# Altium PCB usb_pd_source.PcbDoc
Units mil, origin at the board's own origin, x right, y up, seen from the top; angles counter-clockwise.
Board outline 3045 x 790 mil, 2 copper layers (Top Layer, Bottom Layer); 22 components, 16 nets, 97 pads, 11 vias.
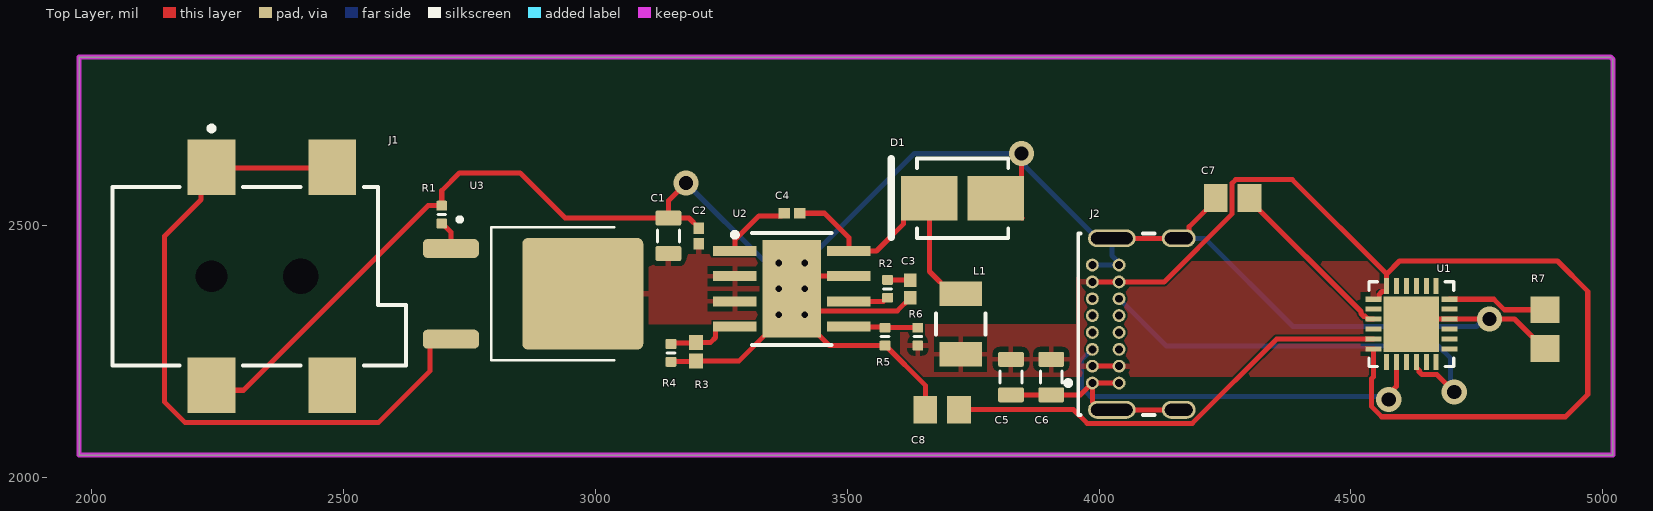
[diagram p0: Top Layer view]
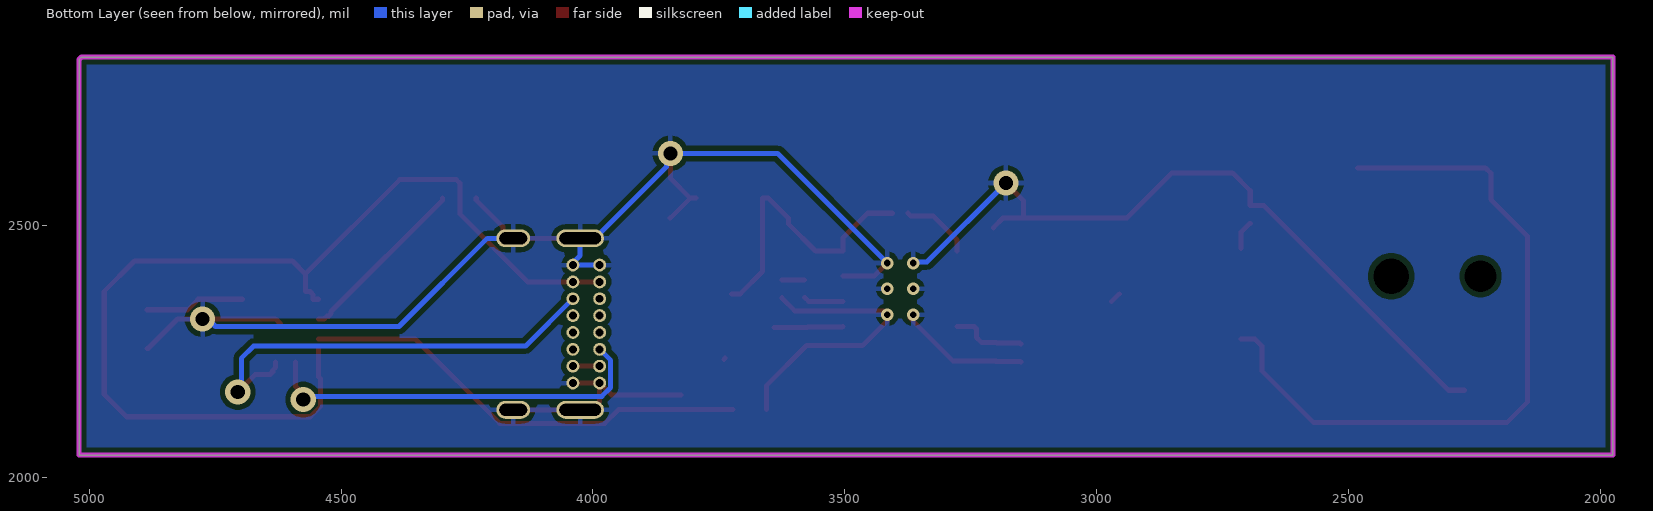
[diagram p1: Bottom Layer view, seen from below]
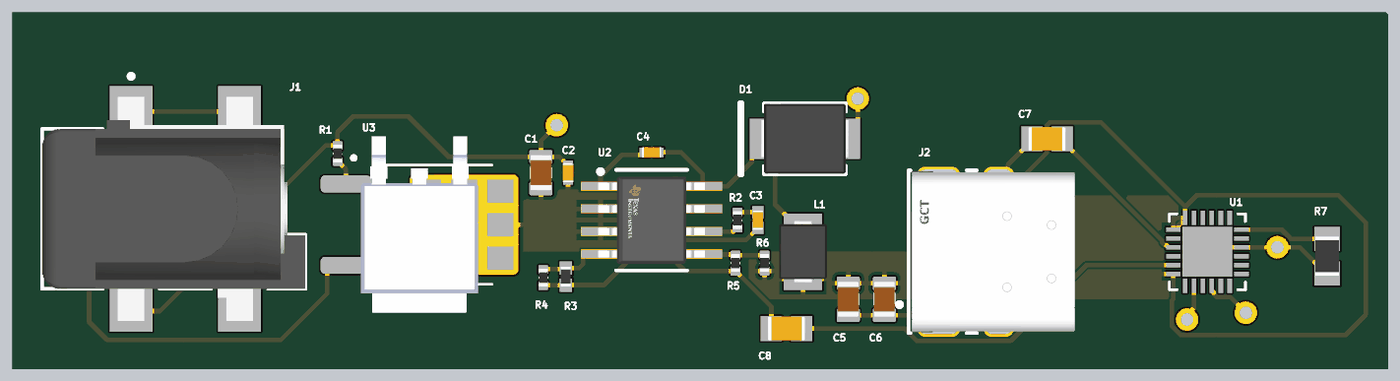
[diagram p2: 3D render of the assembled board from above, using the file's embedded part models]

## Layer stack, top to bottom
Top Solder: solder mask 0.4, Solder Resist, Dk 3.5
Top Layer: signal copper 1.4
Dielectric 1: dielectric 12.6, FR-4, Dk 4.8
Bottom Layer: signal copper 1.4
Bottom Solder: solder mask 0.4, Solder Resist, Dk 3.5

## Board outline
1975,2045 5020,2045 5020,2830 5015,2835 1975,2835

## Design rules (kind name [scope] priority, off if disabled: settings)
Clearance [All] p1: gap=4 ignorepadtopadclearanceinfootprint=FALSE
HoleSize [All] p1: absolutevalues=TRUE maxlimit=150 minlimit=10 maxpercent=80.000 minpercent=20.000
MinimumAnnularRing [All] p1: minimumring=4
MinimumSolderMaskSliver [All] p1: minsoldermaskwidth=1
PolygonConnect [All] p1: connectstyle=Relief reliefconductorwidth=10 reliefentries=4 polygonreliefangle="90 Angle" airgapwidth=10
RoutingVias [All] p1: holewidth=10 width=22 viastyle="Through Hole" minholewidth=10 minwidth=22 maxholewidth=100 maxwidth=150
SilkToSolderMaskClearance [IsPad] p1: minsilkscreentomaskgap=3 clearancetoexposedcopper=TRUE
SolderMaskExpansion [All] p1: expansion=4 istentingtop=FALSE
Width [All] p1: maxlimit=150 minlimit=8 preferedwidth=10
27 further rules are at their usual default settings.

## Classes and differential pairs
component class sheet3_pd_controller: C7 C8 R7 U1
component class sheet2_buck_converter: C3 C4 C5 C6 D1 L1 R2 R3 R4 R5 R6 U2
component class sheet1_input_and_protection: C1 C2 J1 R1

## Components (designator, comment, footprint, x,y, rotation, side; value= is the part's Value field where it differs from the comment)
C1 "Capacitor 22µF +/-40% 16V 0805" CAPC0805(2012)145_L 3145,2480 r270 top value=22µF
C2 "Capacitor 0.1 uF +/- 5% 16 V 0402" CAPC1005X56X25LL10T15 3205,2480 r270 top value=100nF
C3 "Capacitor 6.8 nF +/- 10% 16 V 0402" CAPC1005X56X25NL10T15 3625,2375 r270 top value=6.8nF
C4 "Capacitor 0.1 uF +/- 5% 16 V 0402" CAPC1005X56X25LL10T15 3390,2525 r180 top value=100nF
C5 "Capacitor 22µF +/-40% 16V 0805" CAPC0805(2012)145_L 3825,2200 r90 top value=22µF
C6 "Capacitor 22µF +/-40% 16V 0805" CAPC0805(2012)145_L 3905,2200 r90 top value=22µF
C7 "Capacitor 1 uF +/- 10% 50 V 0805" CAPC2013X135X45NL10T25 4265,2555 r180 top value=1µF
C8 "Capacitor 1 uF +/- 10% 50 V 0805" CAPC2013X135X45NL10T25 3688.46,2135 r180 top value=1µF
D1 "SS54B" JCET-SMB-2_M 3729.06,2555 r180 top
J1 "PJ-002AH-SMT-TR" CUI-PJ-002AH-4_V 2332.32,2400 r0 top
J2 "USB4085-GF-A" FP-USB4085-GF-A-MFG 4145,2305 r90 top
L1 "CM322522-100KL" BOUR-CM322522_V 3725,2305 r270 top
R1 "100KR2F" RESC0402(1005)_L 2695,2522.28 r270 top value=100k
R2 "12KR2F" RESC0402(1005)_L 3580,2375 r270 top value=12k
R3 "Resistor 33k +/-5% 0402 63 mW" RESC1005X40X25ML10T10 3200,2250 r90 top value=33k
R4 "324KR2F" RESC0402(1005)_L 3150,2247.72 r90 top value=324k
R5 "Resistor 5K6  +/-5 % 0402 63 mW" RESC0402(1005)_L 3575,2280 r270 top value=8k
R6 "Resistor 43K2 +/-1 % 0402 63 mW" RESC0402(1005)_L 3640,2280 r270 top value=43.2k
R7 "Resistor 4k7 +/-1% 0805 125 mW" RESC2013X70X40ML20T20 4885,2295 r270 top value=4.7k
U1 "STUSB4710AQTR" *QFN24EP_4X4_STM 4620,2305 r90 top
U2 "TPS54560DDA" FP-DDA0008E-MFG 3390,2375 r0 top
U3 "Component_1" DPAK228P990X239-4N 2876.18,2365 r270 top

## Footprints (in the part's own frame and the unit in brackets; to place one, negate y for a bottom-side part, rotate by r counter-clockwise, add the part's x,y. Pads: shape width x height; smd on the part's side, far side on the other; paste and mask are expansions set on the pad)
*QFN24EP_4X4_STM [mm]
  rect 0.808x0.255 smd: 1(-1.915,1.25) 2(-1.915,0.75) 3(-1.915,0.25) 4(-1.915,-0.25) 5(-1.915,-0.75) 6(-1.915,-1.25) 13(1.915,-1.25) 14(1.915,-0.75) 15(1.915,-0.25) 16(1.915,0.25) 17(1.915,0.75) 18(1.915,1.25)
  rect 0.255x0.808 smd: 7(-1.25,-1.915) 8(-0.75,-1.915) 9(-0.25,-1.915) 10(0.25,-1.915) 11(0.75,-1.915) 12(1.25,-1.915) 19(1.25,1.915) 20(0.75,1.915) 21(0.25,1.915) 22(-0.25,1.915) 23(-0.75,1.915) 24(-1.25,1.915)
  rect 2.794x2.794 smd: 25(0,0)
  silkscreen extent -2.13,-2.13 2.13,2.13
BOUR-CM322522_V [mm] "Inductor, 2-Leads, Body 3.2x2.5mm, Pitch 3.05mm"
  rect 1.25x2.15 smd: 1(-1.525,0) 2(1.525,0)
  silkscreen extent -0.54,-1.25 0.54,1.25, body extent -1.77,-1.35 1.77,1.35, height 2.4
CAPC0805(2012)145_L [mm] "Chip Capacitor, Body 2.0x1.2mm, Height 1.45mm, IPC High Density"
  rrect25% 0.76x1.3 smd: 1(-0.9,0) 2(0.89,0)
  silkscreen extent -0.3,-0.55 0.3,0.55, body extent -1,-0.6 1,0.6, height 1.45
CAPC1005X56X25LL10T15 [mm] "Chip Capacitor, 2-Leads, Body 1.10x0.60mm, IPC High Density"
  rect 0.58x0.54 smd: 1(-0.39,0) 2(0.39,0)
  body extent -0.55,-0.3 0.55,0.3, height 0.56
CAPC1005X56X25NL10T15 [mm] "Chip Capacitor, 2-Leads, Body 1.10x0.60mm, IPC Medium Density"
  rect 0.68x0.64 smd: 1(-0.44,0) 2(0.44,0)
  body extent -0.55,-0.3 0.55,0.3, height 0.56
CAPC2013X135X45NL10T25 [mm] "Chip Capacitor, 2-Leads, Body 2.10x1.35mm, IPC Medium Density"
  rect 1.2x1.4 smd: 1(-0.85,0) 2(0.85,0)
  body extent -1.05,-0.67 1.05,0.67, height 1.35
CUI-PJ-002AH-4_V [mm] "SMD, 4-Leads, Body 14.8x9 mm, Pitch 6.1mm"
  rect 2.4x2.8 smd: 1(-2.4,5.5) 1(3.7,5.5) 2(-2.4,-5.5) 3(3.7,-5.5)
  round 0 hole 1.6: MH1(-2.4,0)
  round 0 hole 1.8: MH2(2.1,0)
  silkscreen extent -7.4,-4.5 7.4,7.57, body extent -7.4,-6.3 7.4,6.3, height 11.2
DPAK228P990X239-4N [mm]
  rrect50% 0.96x2.83 smd: 1(-2.286,-4.14) 3(2.286,-4.14)
  rrect10% 5.63x6.1 smd paste-4: 2(0,2.51)
  silkscreen extent -3.86,-3.81 3.35,4.09, body extent -4.95,-3.29 4.95,3.29, height 2.39
FP-DDA0008E-MFG [mm]
  rect 2.2x0.5 smd paste-1000 mask+0: 1(-2.875,1.905) 2(-2.875,0.635) 3(-2.875,-0.635) 4(-2.875,-1.905) 5(2.875,-1.905) 6(2.875,-0.635) 7(2.875,0.635) 8(2.875,1.905)
  rect 2.95x4.9 smd paste-1000 mask-1000: 9(0,0)
  silkscreen extent -3,-2.83 2,2.85, body extent -4.08,-2.68 4.08,2.68, height 0.25
FP-USB4085-GF-A-MFG [mm]
  rrect100% 0.9x2.4 hole 2.1 slot 0.6 at 0 deg paste-2539.97 mask+0: 1(-4.325,3.045) 2(4.325,3.045)
  rrect100% 0.9x1.7 hole 1.4 slot 0.6 at 0 deg paste-2539.97 mask+0: 3(-4.325,-0.335) 4(4.325,-0.335)
  round 0.65 hole 0.4 paste-2539.97 mask+0: A1(-2.975,4.025) A4(-2.125,4.025) A5(-1.275,4.025) A6(-0.425,4.025) A7(0.425,4.025) A8(1.275,4.025) A9(2.125,4.025) A12(2.975,4.025) B1(2.975,2.675) B4(2.125,2.675) B5(1.275,2.675) B6(0.425,2.675) B7(-0.425,2.675) B8(-1.275,2.675) B9(-2.125,2.675) B12(-2.975,2.675)
  silkscreen extent -4.57,0.89 4.57,5.37, body extent -4.87,-4.83 4.87,4.83, height 0.25
JCET-SMB-2_M [mm] "Molded Diode, 2-Leads, Body 4.57x3.94mm"
  rect 2.85x2.25 smd: 1(-1.675,0) 2(1.675,0)
  silkscreen extent -2.3,-2 3.6,2, body extent -2.5,-1.97 2.5,1.97, height 2.44
RESC0402(1005)_L [mm] "Chip Resistor, Body 1.0x0.5mm, IPC High Density"
  rrect25% 0.5x0.55 smd: 1(-0.45,0) 2(0.45,0)
  silkscreen extent 0,-0.2 0,0.2, body extent -0.5,-0.25 0.5,0.25, height 0.3
RESC1005X40X25ML10T10 [mm] "Chip Resistor, 2-Leads, Body 1.1x0.6mm, IPC Low Density"
  rect 0.75x0.7 smd: 1(-0.475,0) 2(0.475,0)
  body extent -0.55,-0.27 0.55,0.28, height 0.4
RESC2013X70X40ML20T20 [mm] "Chip Resistor, 2-Leads, Body 2.2x1.35mm, IPC Low Density"
  rect 1.35x1.45 smd: 1(-0.975,0) 2(0.975,0)
  body extent -1.1,-0.67 1.1,0.67, height 0.7

## Part data
C1 C5 C6: library part CMP-001-00081-4, "Chip Capacitor, 22µF +/-40%, 16V, 0805, Thickness 1.45 mm", Case/Package=0805, Max Operating Temperature=85°C, Min Operating Temperature=-55°C, Tolerance=5%, Voltage Rating=16V, Mounting Technology=SMT, Pins=2
C2 C4: library part CMP-001-00001-6, "Chip Capacitor, 0.1 uF, +/- 5%, 16 V, 0402 (1005 Metric)", Capacitor Type=Ceramic, Case/Package=0402, Max Operating Temperature=125°C, Min Operating Temperature=-55°C, Tolerance=5%, Voltage Rating=16V, Mounting Technology=SM, Pins=2, RoHS Compliant=True
C3: library part CMP-001-00000-6, "Chip Capacitor, 6.8 nF, +/- 10%, 16 V, 0402 (1005 Metric)", Capacitor Type=Ceramic, Case/Package=0402, Max Operating Temperature=125°C, Min Operating Temperature=-55°C, Tolerance=10%, Voltage Rating=16V, Mounting Technology=SM, Pins=2, RoHS Compliant=True
C7 C8: library part CMP-001-00007-6, "Chip Capacitor, 1 uF, +/- 10%, 50 V, 0805 (2012 Metric)", Capacitor Type=Ceramic, Case/Package=0805, Max Operating Temperature=125°C, Min Operating Temperature=-55°C, Tolerance=10%, Voltage Rating=50V, Mounting Technology=SM, Pins=2, RoHS Compliant=True
D1: library part CMP-004-00006-2, "Schottky Barrier Rectifier, 40 V, 5 A, -55 to 150 degC, 2-Pin SMD", Case/Package=SMB-2, Manufacturer=JCET, Package Description="2-Pin Surface Mount Device, Body 4.315 x 3.62 mm", Datasheet URL=http://wiki.seeedstudio.com/images/3/3f/0310130P1.pdf, Datasheet Version=May-13, Manufacturer URL=http://www.cj-elec.com/, Mounting Technology=SM, Package Reference=SMB-2, RoHS Compliant=Unknown
J1: library part CMP-2000-06896-2, "DC Power Jack, Right Angle, -25 to 85 degC, 4-Pin 14.8 x 9 x 11 mm SMD, RoHS, Tape and Reel", Current Rating=5A, Flammability Rating=UL94V-0, Insulation Resistance=100MOhms, Manufacturer=CUIInc., Operating Temperature Range=-25Cto+85C, Package Description="4-Pin Surface Mount Device, Body 14.8 x 9 mm, Pitch 6.1 mm", Package Reference=PJ-002AH, Voltage Rating=24V, Brand=CUI, Connector Type=DCPowerJack, Contact Gender=Male, Contact Material=Brass, Contact Plating=Nickel, Datasheet URL=http://www.cui.com/product/resource/pj-002ah-smt.pdf, Datasheet Version="Rev. 1.03, 11/2012", Factory Pack Quantity=350, Housing Material=Polyamide(PA), Inside Contact Diameter=2mm, Manufacturer URL=http://www.cui.com/, Mounting Angle=Right, Mounting Style=SMD/SMT, Mounting Technology=SurfaceMount, Outside Contact Diameter=6.5mm, Packaging=Reel, PartNumber=PJ-002AH, Product=Jacks, Product Category=DCPowerConnectors, RoHS=True, Termination Style=SMD/SMT
J2: library part CMP-196119-000001-2, "CONN RCPT USB2.0 TYPE C 24POS RA", Contact Material="Copper Alloy", Contact Plating=Gold, Gender=Receptacle, Number of Positions=16, Orientation="Right Angle", USB Standard="USB 2.0"
L1: library part CMP-006-00005-3, "Chip Inductor, 10 uH, +/- 10%, -40 to 125 degC, 1210 (3225 Metric), RoHS, Tape and Reel", Case/Package=1210, Current Rating=140mA, Inductance=10µH, Inductance Tolerance=10%, Manufacturer=Bourns, Max Operating Temperature=100°C, Min Operating Temperature=-20°C, Package Description="2-Pin Surface Mount Device, Body 3.2 x 2.5 mm", Package Quantity=1, Resistance=2.1Ohm, Self Resonant Frequency=30MHz, Core Material=Ferrite, Datasheet URL=http://www.murata.com/~/media/webrenewal/support/library/catalog/products/emc/emifil/c30e.ashx?la=en-gb, Datasheet Version=Aug-14, Mounting Technology=SM, Package Reference=1210, Packaging=TapeandReel, Pins=2, Q Factor=30, RoHS Compliant=True, Shielding=Unshielded, Tolerance=10%
R1: library part CMP-009-00064-2, "100K 0.063W 1% 0402 (1005 Metric)  SMD", Case/Package=0402, Power=63mW, Tolerance=1%, Mounting Technology=SMT, Pins=2
R2: library part CMP-009-00071-2, "12K 0.063W 1% 0402 (1005 Metric)  SMD", Case/Package=0402, Power=63mW, Tolerance=1%, Mounting Technology=SMT, Pins=2
R3: library part CMP-009-00028-5, "Chip Resistor, 33 KOhm, +/- 5%, 0.063 W, -55 to 155 degC, 0402 (1005 Metric)", Case/Package=0402, Max Operating Temperature=155°C, Min Operating Temperature=-55°C, Power=63mW, Tolerance=5%, Mounting Technology=SM, Pins=2, RoHS Compliant=True
R4: library part CMP-009-00094-2, "324K 0.063W 1% 0402 (1005 Metric)  SMD", Case/Package=0402, Power=63mW, Tolerance=1%, Mounting Technology=SMT, Pins=2
R5: library part CMP-009-00136-3, "Chip Resistor, 5,6 kOhms, +/-5 %, 63 mW, -55 to 155 degC, 0402", Case/Package=0402, Max Operating Temperature=155°C, Min Operating Temperature=-55°C, Power=63mW, Tolerance=5%, Pins=2
R6: library part CMP-009-00154-3, "Chip Resistor, 43,2 kOhms, +/-1 %, 63 mW, -55 to 155 degC, 0402", Case/Package=0402, Max Operating Temperature=155°C, Min Operating Temperature=-55°C, Power=63mW, Tolerance=1%, Pins=2
R7: library part CMP-009-00032-5, "Chip Resistor, 4.7 KOhm, +/- 1%, 0.125 W, -55 to 155 degC, 0805 (2012 Metric)", Case/Package=0805, Max Operating Temperature=155°C, Min Operating Temperature=-55°C, Power=125mW, Tolerance=1%, Voltage Rating=150V, Mounting Technology=SM, Pins=2, RoHS Compliant=True
U1: library part CMP-036-000000-1, "USB Controller USB 2.0 I2C Interface 24-QFN (4x4)", Package="QFN-24 STMicroelectronics", Check_prices=https://www.snapeda.com/parts/STUSB4710AQTR/STMicroelectronics/view-part/?ref=eda, Design Item ID=STUSB4710AQTR, MF=STMicroelectronics, MP=STUSB4710AQTR, SnapEDA_Link=https://www.snapeda.com/parts/STUSB4710AQTR/STMicroelectronics/view-part/?ref=snap, Source=STUSB4710AQTR.SchLib
U2: library part CMP-04918-000033-1, "IC REG BCK SPLIT RAIL ADJ 8SOPWR", Manufacturer="Texas Instruments", Max Junction Temp=+150°C, Max Supply Voltage=60V, Min Supply Voltage=4.5V, Nominal Supply Current=146uA, Output Current=5A, Output Voltage=0.8-58.8V, Package=DDA0008E, Switching Frequency=100-2500kHz, Temperature="-40°C to +125°C", Temperature Range High=+125°C, Temperature Range Low=-40°C, Automotive=No, Category=IC, ComponentLink2Description=Datasheet, ComponentLink2URL=http://www.ti.com/lit/ds/symlink/tps54560.pdf, Device Class L1="Integrated Circuits (ICs)", Device Class L2="Power Management ICs", Device Class L3="Voltage Regulators - Switching", Digikey Description="IC REG BCK SPLIT RAIL ADJ 8SOPWR", Height=1.7mm, Ipc Land Pattern Name=SOIC127P600X170-8, Lead Free=Yes, Manufacturer Part Number=TPS54560DDA, Max Duty Cycle=100%, Mouser Description="Voltage Regulators - Switching Regulators 60V Input 5 A SD DC-DC Cnvtr", Number Of Outputs=1, Octopart=https://octopart.com/tps54560dda-texas+instruments-26977150, Output Type=AdjustableProgrammable, RoHS=TRUE, Standoff Height=0mm, Switching Topology=Buck

## Via types
v1: diameter 24.8, hole 12.99, Top Layer to Bottom Layer, 6 vias
v2: diameter 50, hole 28, Top Layer to Bottom Layer, 5 vias

## Nets (pads, with @x,y where several pads share a name; then routed paths per layer and width w, separated by ;. In a path a pad name is that pad's centre, name@x,y a point inside that pad or via, vN(x,y) a via of type N, cw(c..) or ccw(c..) an arc to the next point about the centre after c; other vN are vias at no path point)
CC1: J2.A5 U1.2 | length 786.1
  Top Layer w10: v2(4575,2155) 4575,2165.82 4590.47,2181.3 U1.2
  Bottom Layer w10: J2.A5 3964.74,2233.01 3964.74,2178.85 3982.15,2161.44 4568.56,2161.44 v2(4575,2155)
CC2: J2.B5 U1.4 | length 885.2
  Top Layer w10: U1.4 4629.84,2218.7 4635.51,2213.04 4635.51,2209.96 4640.78,2204.69 4670.31,2204.69 v2(4705,2170)
  Bottom Layer w10: J2.B5 4133.41,2261.47 4673.53,2261.47 4697.94,2237.06 4697.94,2177.06 v2(4705,2170)
GND: C1.1 C2.1 C3.2 C5.1 C6.1 C7.2 C8.2 D1.1 J1.2 J2.1 J2.2 J2.3 J2.4 J2.A1 J2.A12 J2.B1 J2.B12 R1.1 R3.1 R4.1 R5.2 R7.2 U1.10 U1.25 U2.7 U2.9 | length 5183.7
  Top Layer w10: J1.2@2270.08,2173.58 2301.42,2173.58 2667.84,2540 R1.1 2695,2569.83 2730,2604.83 2850.71,2604.83 2940.11,2515.43 C1.1 ; R4.1 3150.65,2230.65 3199.35,2230.65 R3.1 3284.68,2231.3 U2.9@3370.81,2317.42 ; v2(3180,2585) 3145,2550 C1.1 ; C2.1 3205,2496.14 3185.71,2515.43 C1.1 ; v1(3415.59,2426.18) 3441.77,2400 U2.7 ; C3.2 3625,2356.89 3599.27,2331.16 3422.93,2331.16 v1(3415.59,2323.82) 3415.59,2311.02 3464.33,2262.28 R5.2 3575.98,2262.28 3655,2183.27 C8.2 ; D1.1 D1.1@3806.81,2555 ; C5.1 C6.1 3963.23,2164.57 J2.A1 ; v2(3846.1,2643.9) 3846.1,2594.29 D1.1@3806.81,2555 ; D1.1@3846.54,2515.28 D1.1@3806.81,2555 ; J2.B12 J2.A1 ; J2.2@4056.61,2487.02 4044.87,2475.28 J2.4 4167.05,2475.28 4178.8,2487.02 4178.8,2498.33 4231.54,2551.06 C7.2 ; J2.3 J2.1 4002.47,2134.72 3986.54,2150.66 J2.A1 ; U1.25 4629.84,2314.84 U1.10 v2(4774.84,2314.84) 4824.8,2314.84 4883.03,2256.61 R7.2
  Bottom Layer w10: v2(3180,2585) 3337.01,2427.99 3362.6,2427.99 v1(3364.41,2426.18) ; v1(3415.59,2426.18) 3633.31,2643.9 v2(3846.1,2643.9) 3853.76,2636.24 3853.76,2617.11 3995.59,2475.28 J2.2 4025.12,2440.91 4039.68,2426.34 J2.B1 J2.A12 ; J2.4 4209.52,2475.28 4384.8,2300 4749.18,2300 4764.02,2314.84 v2(4774.84,2314.84)
  other v1: 3364.41,2323.82 3364.41,2375 3415.59,2375
NetC3_1: C3.1 R2.1 | length 45.2
  Top Layer w10: R2.1 3580.2,2392.52 3624.8,2392.52 C3.1
NetC4_1: C4.1 D1.2 L1.1 U2.8 | length 580.9
  Top Layer w10: C4.1 3455,2525 3503.19,2476.81 U2.8 3558.11,2450 3612.01,2503.9 3612.01,2515.71 3651.3,2555 D1.2 3663.11,2409.21 3707.28,2365.04 L1.1
NetC4_2: C4.2 U2.1 | length 141.7
  Top Layer w10: U2.1 3276.81,2471.81 3324.37,2519.37 3369.02,2519.37 C4.2
NetC7_1: C7.1 U1.21 | length 350.3
  Top Layer w10: C7.1 4298.46,2551.06 4519.69,2329.84 4519.69,2325.78 4524.96,2320.51 4528.04,2320.51 4533.69,2314.86 U1.21@4544.58,2314.86
NetC8_1: C8.1 U1.23 | length 903.2
  Top Layer w10: C8.1 3949.28,2135 3976.27,2108.01 4185,2108.01 4352.47,2275.47 U1.23
NetR1_2: R1.2 U3.1 | length 57.7
  Top Layer w10: R1.2 2695.98,2504.57 2713.19,2487.36 U3.1
NetR2_2: R2.2 U2.6 | length 79.8
  Top Layer w10: U2.6 3571.73,2350 3579.02,2357.28 R2.2
NetR3_2: R3.2 R4.2 U2.4 | length 150.9
  Top Layer w10: R4.2 3151.63,2267.07 3198.37,2267.07 R3.2 3228.78,2268.7 3238.5,2278.43 3238.5,2295.16 3243.35,2300 U2.4
NetR5_1: R5.1 R6.1 U2.5 | length 137.8
  Top Layer w10: U2.5 3504.33,2298.86 3573.86,2298.86 R5.1 R6.1
NetR7_1: R7.1 U1.12 | length 198.2
  Top Layer w10: U1.12 4783.56,2354.21 4804.38,2333.39 R7.1
Vin: J1.1 U3.3 | length 1435.6
  Top Layer w10: J1.1@2482.28,2615 2227.83,2615 2217.28,2604.44 2217.28,2552.28 2145,2480 2145,2150 2185,2110 2569.62,2110 2671.93,2212.31 2671.93,2261.44 2685.49,2275 U3.3
Vin_protected: C1.2 C2.2 U2.2 U2.3 U3.2 | length 21.2
  Top Layer w10: U3.2@2955,2365 U3.2@2970,2350
Vout_5V: C5.2 C6.2 J2.A4 J2.A9 J2.B4 J2.B9 L1.2 R6.2 U1.18 U1.19 U1.24 | length 2122.1
  Top Layer w10: L1.2@3737.68,2237.32 L1.2@3740,2235 ; J2.A4 J2.B9 ; J2.A9 J2.B4 4129.11,2388.66 4264.16,2523.71 4264.16,2584.6 4271.11,2591.56 4383.65,2591.56 4570.8,2404.4 ; U1.24 4544.59,2200.14 4541,2196.55 4541,2140.92 4560.92,2121 4926,2121 4970,2165 4970,2370 4910,2430 4596.4,2430 4570.8,2404.4 ; U1.19 U1.19@4555.48,2354.21 ; U1.19@4555.5,2354.23 4555.5,2363.23 4561.77,2369.5 U1.18@4570.77,2369.5 ; U1.18@4570.79,2369.52 U1.18 4570.8,2404.4
pads on no net: J1.3 J1.MH1 J1.MH2 J2.A6 J2.A7 J2.A8 J2.B6 J2.B7 J2.B8 U1.1 U1.3 U1.5 U1.6 U1.7 U1.8 U1.9 U1.11 U1.13 U1.14 U1.15 U1.16 U1.17 U1.20 U1.22

## Polygon pours and split planes (outlines as drawn)
Vout_5V on Top Layer "VOUT_5V_L01_P007" (solid, remove dead copper, pour order 7): 3605,2280 3605,2200 4580,2200 4585,2205 4585,2430 4070,2430 4070,2405 3955,2405 3955,2305 3605,2305
Vin_protected on Top Layer "VIN_PROTECTED_L01_P000" (solid, remove dead copper, pour order 0): 3325,2480 3070,2480 3070,2305 3325,2305
GND on Bottom Layer "GND_L02_P011" (solid, remove dead copper, pour order 11): 1975,2835 1975,2045 5020,2045 5020,2830

## Keep-outs
Keep-Out Layer:
  the board outline again, w10

## Text inside footprints (layer, text, board x,y; h text height)
U1: Mechanical 4 "*" at 4564.45,2214.19 h15 r90; Mechanical 4 "*" at 4564.45,2214.19 h15 r90